# Altium PCB Overo Carrier.PcbDoc (part 1 of 2)
Units mil, origin at the board's own origin, x right, y up, seen from the top; angles counter-clockwise.
Board outline 2283.46 x 1417.32 mil, 2 copper layers (Top Layer, Bottom Layer), stack 22.091 mil thick; 56 components, 60 nets, 366 pads, 111 vias.
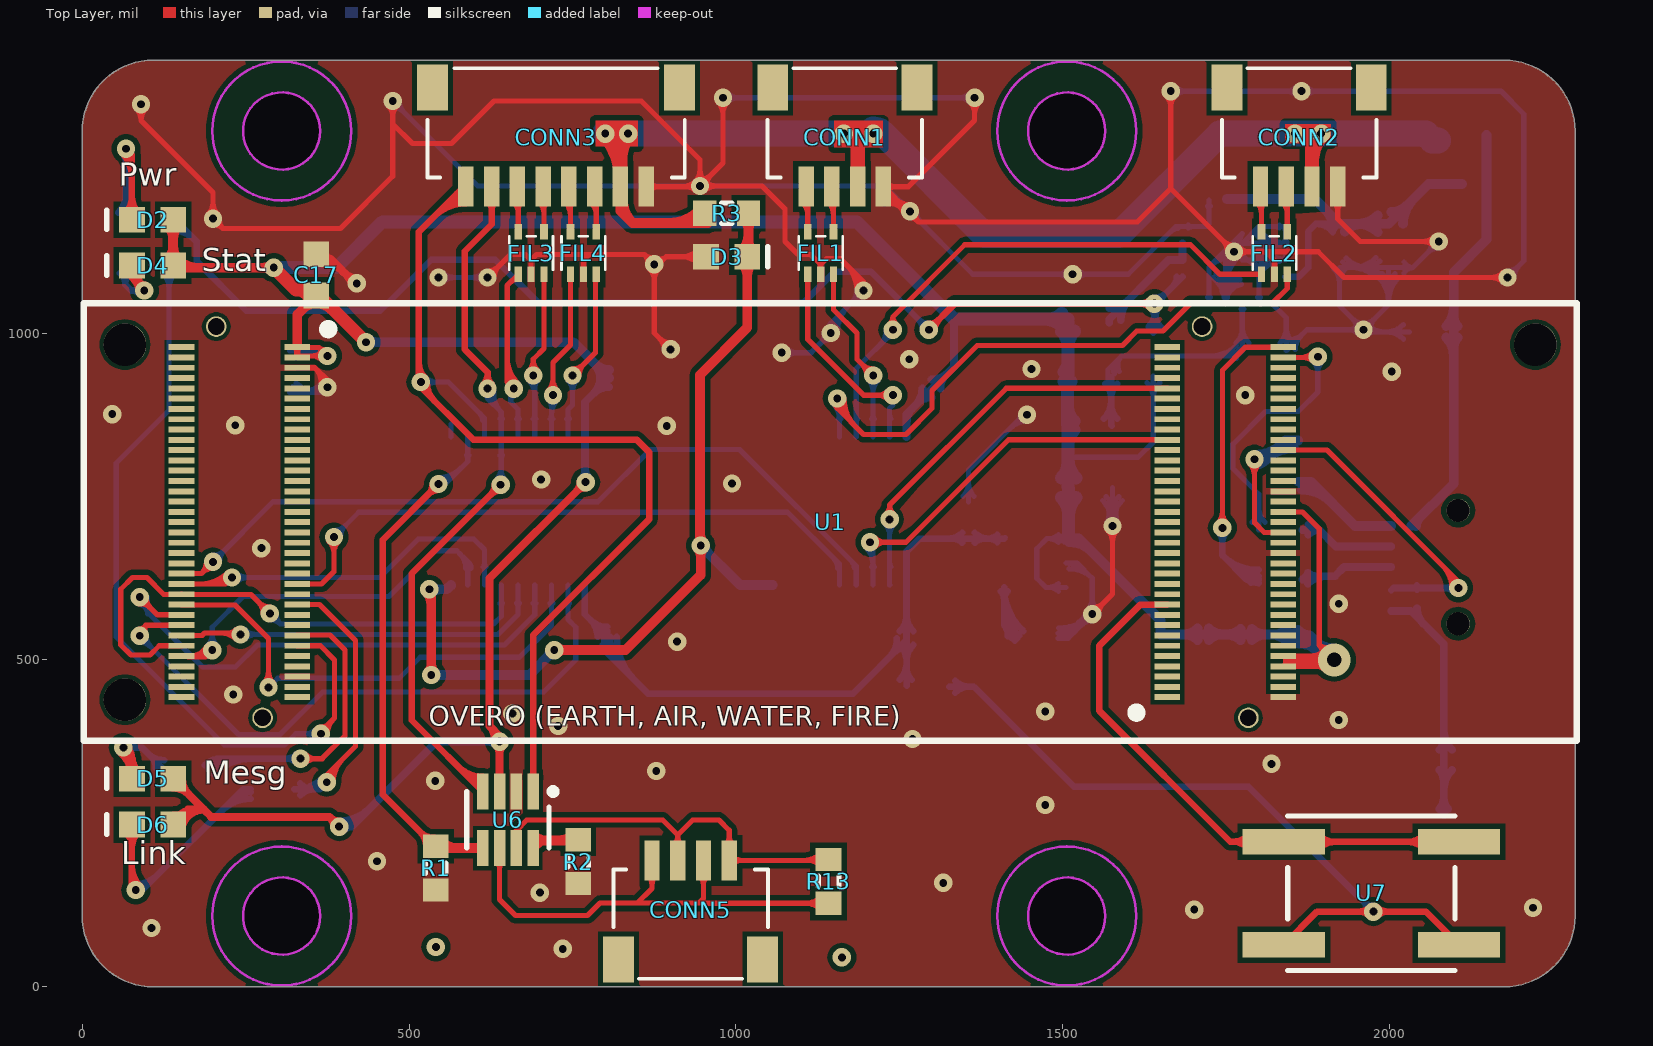
[diagram p0: Top Layer view]
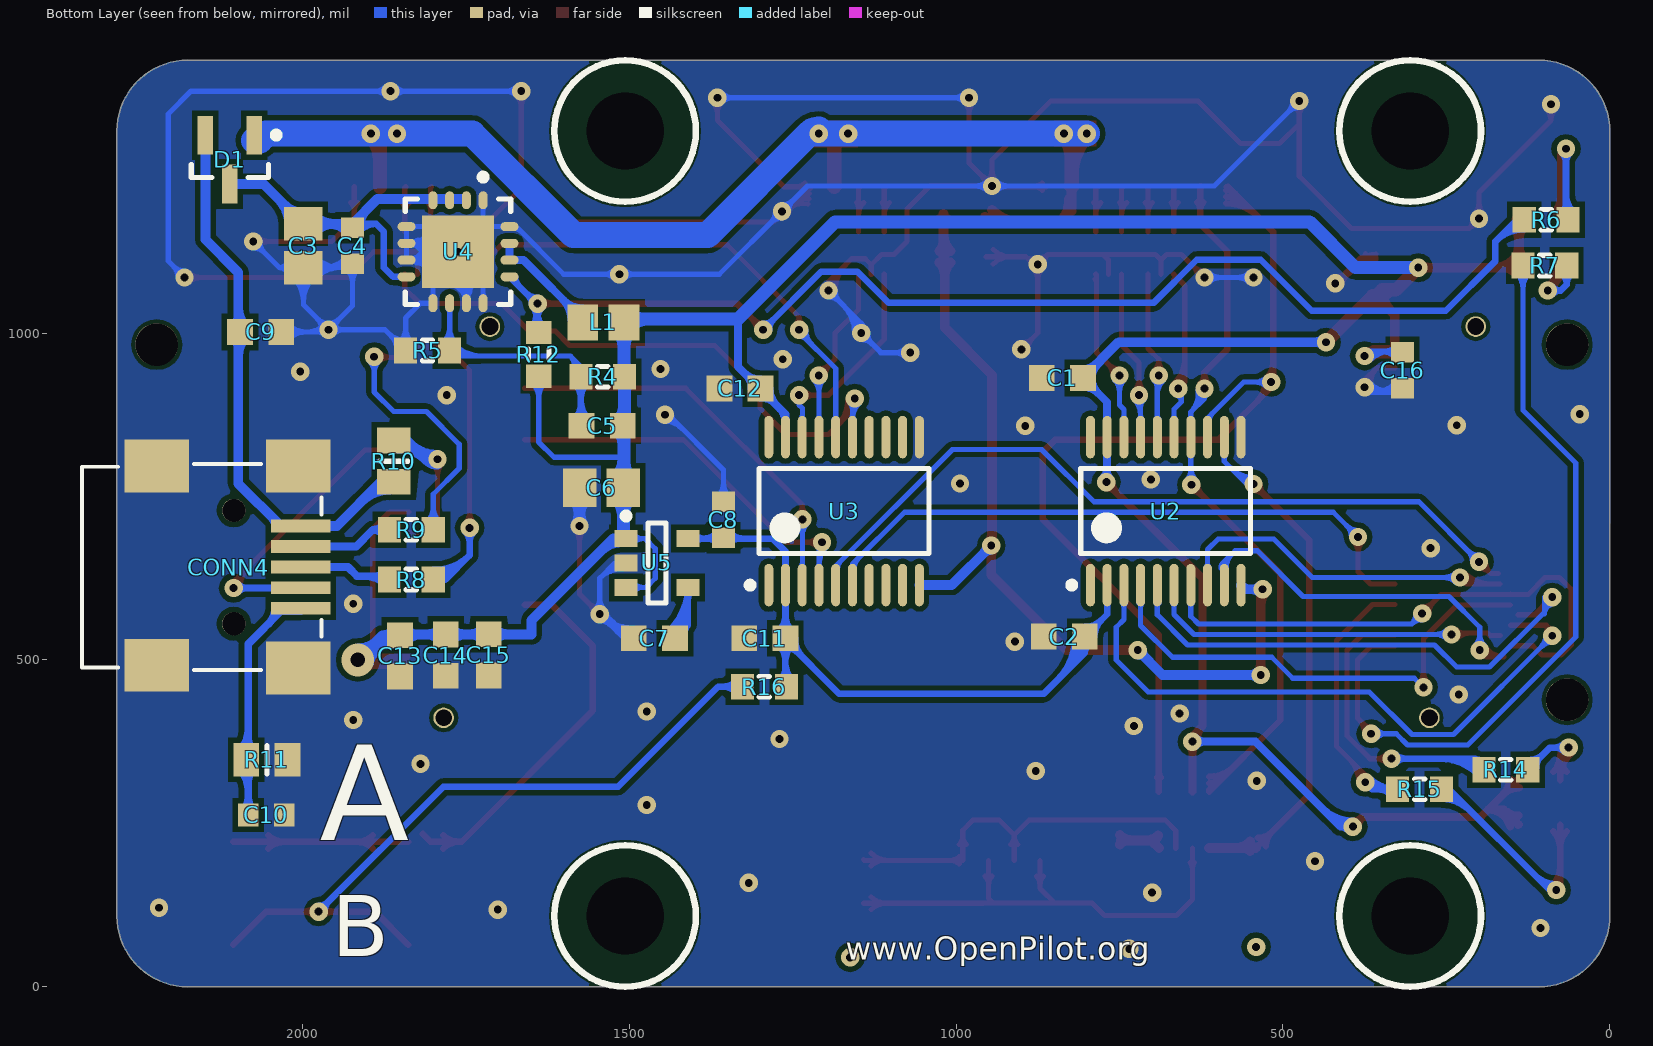
[diagram p1: Bottom Layer view, seen from below]
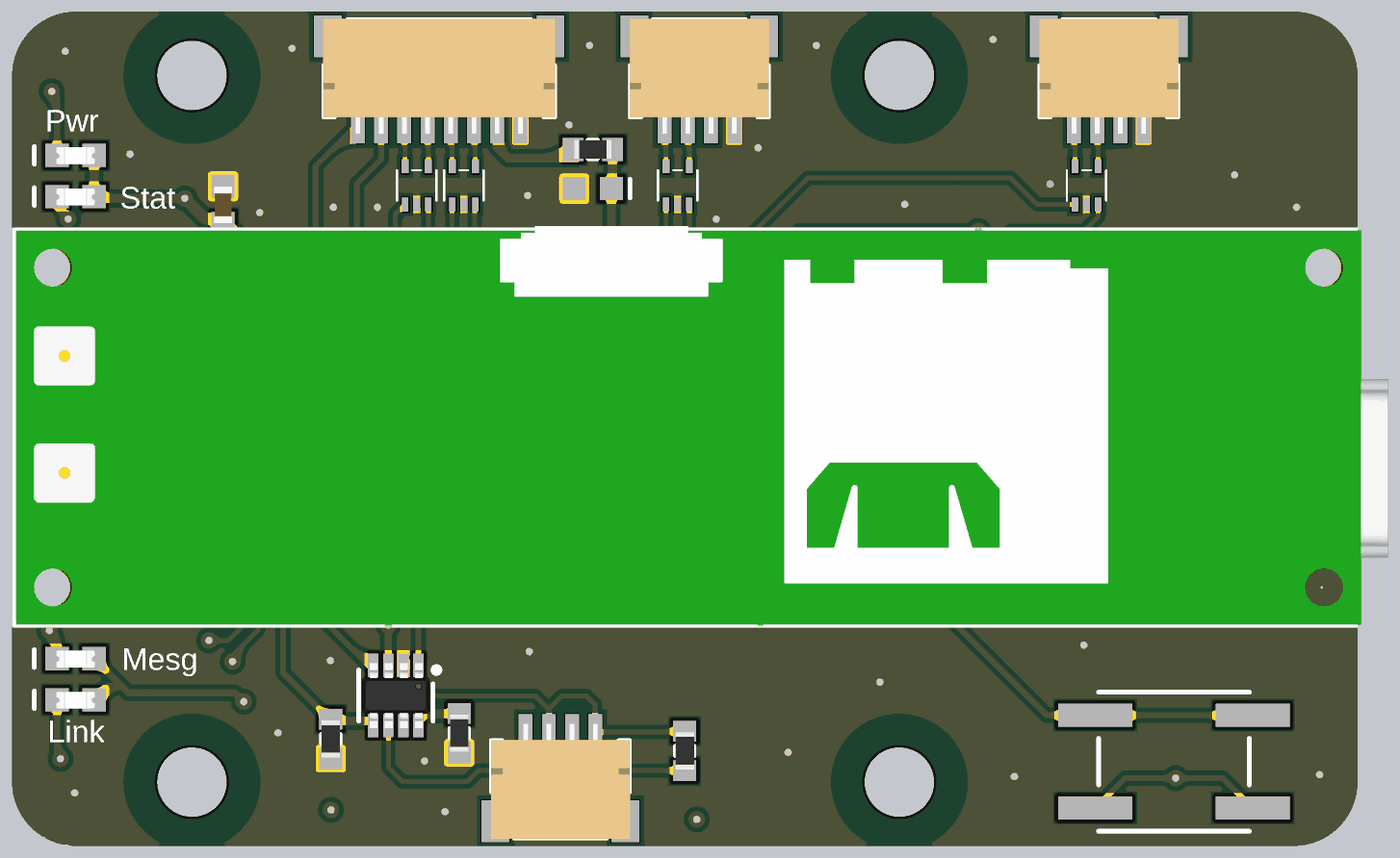
[diagram p3: 3D render of the assembled board from above, using the file's embedded part models]
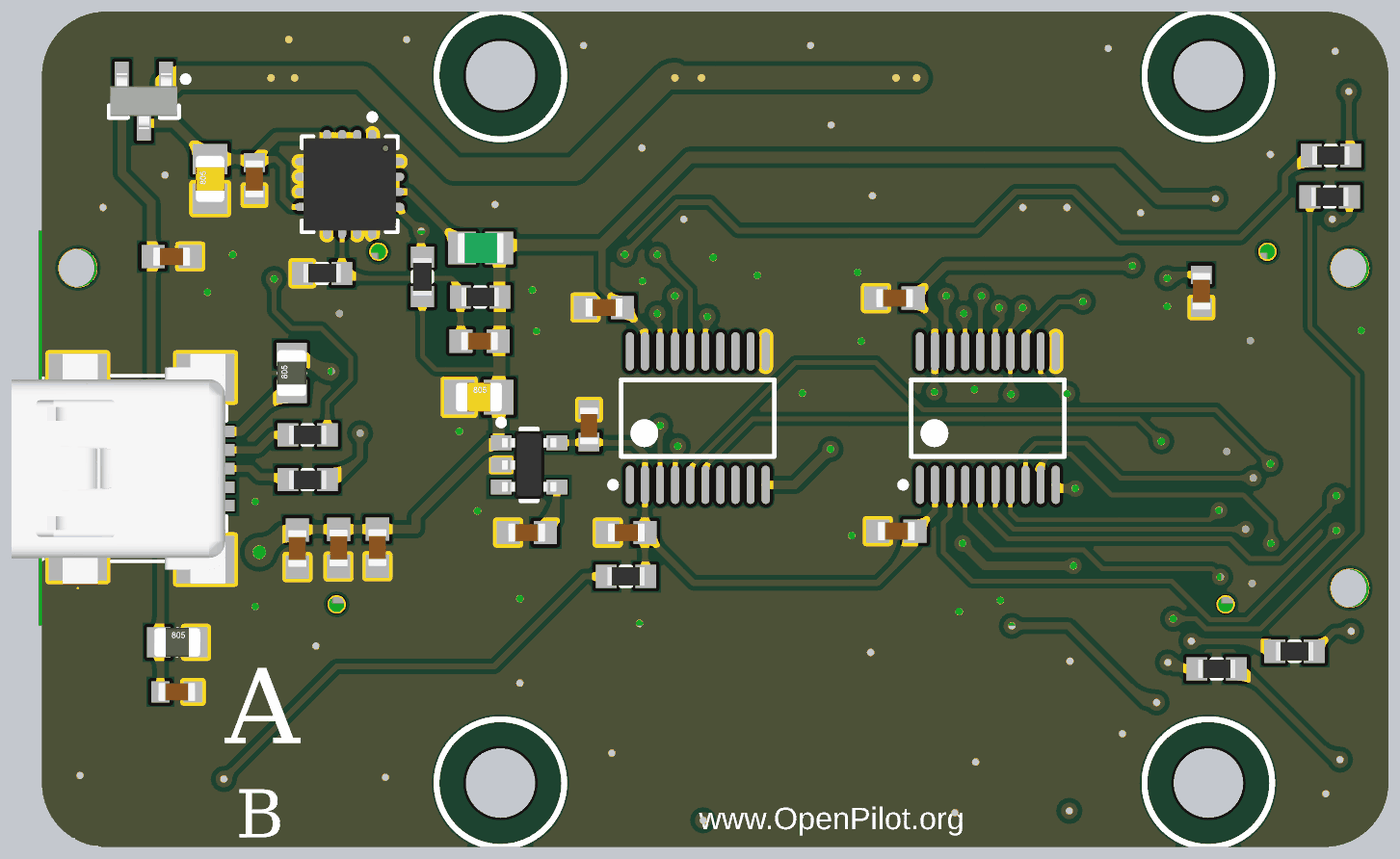
[diagram p4: 3D render of the assembled board from below, using the file's embedded part models]

## Layer stack, top to bottom
Top Layer: signal copper 1.4
Dielectric: core 19.2913, FR-4, Dk 4.8
Bottom Layer: signal copper 1.4

## Board outline
108.27,0 cw(c108.27,108.27) 0,108.27 0,1309.05 cw(c108.27,1309.05) 108.27,1417.32 2175.2,1417.32 cw(c2175.2,1309.05) 2283.46,1309.05 2283.46,108.27 cw(c2175.2,108.27) 2175.2,0

## Design rules (kind name [scope] priority, off if disabled: settings)
Clearance "Clearance Small Footprints" [HasFootprint('OVERO') OR HasFootprint('SOT23-8')] p1: gap=6
Clearance [All] p2: gap=8
ComponentClearance [NOT (HasFootprint('SIP3 - 0.1'))] p1: gap=10 collisioncheckmode=3 verticalgap=10 showdistances=FALSE
FabricationTestPointUsage TestPointUsage [All] p1: valid=0 allowmultiple=FALSE
FabricationTestpoint Testpoint [All] p1: side=3 testpointundercomponent=TRUE minsize=40 maxsize=100 preferedsize=60 minholesize=0 maxholesize=40 preferedholesize=32 testpointgrid=1 allowsidetop=TRUE allowsidebottom=TRUE usegrid=TRUE gridtolerance=0.01
HoleSize [All] p1: absolutevalues=TRUE maxlimit=157.48 minlimit=0.98 maxpercent=80.000 minpercent=20.000
MinimumAnnularRing [All] p1: minimumring=8
MinimumSolderMaskSliver [All] p1: minsoldermaskwidth=3
PlaneClearance [All] p1: clearance=9
PolygonConnect [All] p1: connectstyle=Direct reliefconductorwidth=20 reliefentries=4 polygonreliefangle="90 Angle"
RoutingVias [All] p1: holewidth=12 width=28 viastyle="Through Hole" minholewidth=12 minwidth=28 maxholewidth=22 maxwidth=50
SilkscreenOverComponentPads [All] p1: minsilkscreentomaskgap=10
SolderMaskExpansion [All] p1: expansion=6
Width [All] p1: maxlimit=80 minlimit=6 preferedwidth=8 minimp=50.000000 maximp=50.000000 favimp=50.000000
21 further rules are at their usual default settings.

## Components (designator, comment, footprint, x,y, rotation, side; value= is the part's Value field where it differs from the comment)
C1 "Cap603" CAP603N 837.4,931.27 r180 bottom
C2 "Cap603" CAP603N 834.4,535.73 r180 bottom
C3 "Cap805" CAP805N 1998.27,1133.6 r90 bottom
C4 "Cap603" CAP603L 1923.27,1133.6 r90 bottom
C5 "Cap603" CAP603N 1541.4,858.27 r180 bottom
C6 "Cap805" CAP805N 1542.4,763.27 r180 bottom
C7 "Cap603" CAP603N 1461.4,533.27 r180 bottom
C8 "Cap603" CAP603L 1355.73,714.4 r270 bottom
C9 "Cap603" CAP603N 2063.6,1001.73 r0 bottom
C10 "Cap603" CAP603L 2055,263 r0 bottom
C11 "Cap603" CAP603N 1292.4,533.27 r180 bottom
C12 "Cap603" CAP603N 1330.4,915.27 r180 bottom
C13 "Cap603" CAP603N 1850.4,506.27 r90 bottom
C14 "Cap603" CAP603N 1780.4,507.27 r90 bottom
C15 "Cap603" CAP603N 1714.6,507.73 r270 bottom
C16 "Cap603" CAP603L 317,943 r90 bottom
C17 "Cap603" CAP603N 358,1089 r270 top
CONN1 "Serial 1" "JST SH 4 Pin Side Entry" 1166.4,1405 r180 top
CONN2 "Serial 2" "JST SH 4 Pin Side Entry" 1861.4,1405 r180 top locked
CONN3 "External SPI / CAN" "JST SH 8 Pin Side Entry" 724.73,1405 r180 top
CONN4 "USB" "USB SMD" 2222.73,642 r270 bottom
CONN5 "CAN" "JST SH 4 Pin Side Entry" 930.6,12.27 r0 top
D1 "BAT54C" SOT23-3N 2110.73,1265.4 r270 bottom
D2 "PWR" LED603N 107.6,1173.27 r0 top
D3 "Diode Zen 3.3V 0603" IND603N 985.6,1116.73 r180 top
D4 "RUN" LED603N 107.6,1103.27 r0 top
D5 "Mesg" LED603N 107.6,318.12 r0 top locked
D6 "Connected" LED603N 107.6,248.12 r0 top locked
FIL1 "IP4256CZ5-W,115" SOT-665 1129.6,1122.27 r90 top
FIL2 "IP4256CZ5-W,115" SOT-665 1823.6,1122.27 r90 top
FIL3 "IP4256CZ5-W,115" SOT-665 686.6,1122.27 r90 top
FIL4 "IP4256CZ5-W,115" SOT-665 766.6,1122.27 r90 top
L1 "FB 550mA 6.8µH 0805" IND805L 1539.4,1016.27 r180 bottom
R1 "Res603" RES603N 540.73,181.6 r90 top
R2 "Res603" RES603N 758.73,191.6 r90 top
R3 "Res603" RES603N 985.6,1183.27 r0 top
R4 "Res603" RES603N 1540.4,933.27 r180 bottom
R5 "Res603" RES603N 1808.4,973.27 r180 bottom
R6 "Res603" RES603N 97.4,1173.27 r180 bottom
R7 "Res603" RES603N 99.4,1103.27 r180 bottom
R8 "Res603" RES603N 1833,623 r180 bottom
R9 "Res603" RES603N 1833,699 r180 bottom
R10 "Res805" RES805L 1860,804 r90 bottom
R11 "Res805" RES805L 2054,347 r180 bottom
R12 "Res603" RES603N 1638.4,967.27 r90 bottom
R13 "Res603" RES603N 1141.6,161.27 r90 top
R14 "Res603" RES603N 159,332 r0 bottom
R15 "Res603" RES603N 291,302 r0 bottom
R16 "Res603" RES603N 1293,459 r0 bottom
U1 "Overo" OVERO 65.27,439.04 r0 top locked
U2 "TXB0108" SOP65P640X162-20N 679.27,727.6 r90 bottom
U3 "TXB0108" SOP65P640X162-20N 1171.27,727.6 r90 bottom
U4 "TPS62111" QFN65P400X400X100-16N 1761.73,1124.4 r270 bottom
U5 "MIC5247-1.8" SOT23-5L 1457.4,648.27 r180 bottom
U6 "CAN Transceiver" SOT23-8 651.27,255.4 r270 top
U7 "Switch push Button" EVQ-Q2K03W 1972,143 r180 top

## Footprints (in the part's own frame and the unit in brackets; to place one, negate y for a bottom-side part, rotate by r counter-clockwise, add the part's x,y. Pads: shape width x height; smd on the part's side, far side on the other; paste and mask are expansions set on the pad)
CAP603L [mm] "Chip Capacitor, Body 1.6x0.8mm, IPC High Density"
  rect 0.8x0.9 smd: 1(-0.7,0) 2(0.7,0)
  body extent -0.8,-0.4 0.8,0.4, height 0.77
CAP603N [mm] "Chip Capacitor, Body 1.6x0.8mm, IPC Medium Density"
  rect 1x1 smd: 1(-0.8,0) 2(0.8,0)
  body extent -0.8,-0.4 0.8,0.4, height 0.77
CAP805N [mm] "Chip Capacitor, Body 2.0x1.3mm, IPC Medium Density"
  rect 1.3x1.5 smd: 1(-0.85,0) 2(0.85,0)
  body extent -1,-0.62 1,0.63, height 0.78
EVQ-Q2K03W [mm] "SWITCH TACTILE SPST-NO 0.02A 15V - P12943SCT-ND"
  rect 3.2x1 smd: A(-3.4,2) A(3.4,2) B(-3.4,-2) B(3.4,-2)
  silkscreen extent -3.25,-3 3.25,3, body extent -3.25,-3 3.25,3, height 3.41
IND603N [mm] "Chip Inductor, Body 1.6x0.8mm, IPC Medium Density"
  rect 1x1 smd: 1(-0.8,0) 2(0.8,0)
  silkscreen extent -1.6,-0.4 -1.6,0.4, body extent -0.87,-0.48 0.87,0.48, height 0.71
IND805L [mm] "Chip Inductor, Body 2.0x1.2mm, IPC High Density"
  rect 1.2x1.4 smd: 1(-0.8,0) 2(0.8,0)
  body extent -1,-0.65 1,0.65, height 0.6
"JST SH 4 Pin Side Entry" [mm] "SM04B-SRSS-TB"
  rect 1.2x1.8 smd paste+0 mask+0.051: 0(-2.8,0.75) 0(2.8,0.75)
  rect 0.6x1.55 smd paste+0 mask+0.051: 1(-1.5,4.6) 2(-0.5,4.6) 3(0.5,4.6) 4(1.5,4.6)
  silkscreen extent -3,0 3,4.25, body extent -3,0 3,4.95, height 2.92
"JST SH 8 Pin Side Entry" [mm] "SM08B-SRSS-TB"
  rect 1.2x1.8 smd paste+0 mask+0.051: 0(-4.8,0.75) 0(4.8,0.75)
  rect 0.6x1.55 smd paste+0 mask+0.051: 1(-3.5,4.6) 2(-2.5,4.6) 3(-1.5,4.6) 4(-0.5,4.6) 5(0.5,4.6) 6(1.5,4.6) 7(2.5,4.6) 8(3.5,4.6)
  silkscreen extent -5,0 5,4.25, body extent -5,0 5,4.95, height 2.92
LED603N [mm] "Chip LED, Body 1.6x0.8mm, IPC Medium Density"
  rect 1x1 smd: 1(-0.8,0) 2(0.8,0)
  silkscreen extent -1.78,-0.38 -1.78,0.38, body extent -0.82,-0.38 0.82,0.34, height 0.68
OVERO [mm] "Gumstix Overo Outline"
  round 1.65 hole 1.65 mask+0.05: 0(0,0) 0(0,13.8) 0(54.8,13.8)
  round 0.8 hole 0.65 mask+0.05: 0(3.55,14.5) 0(5.35,-0.7) 0(41.85,14.5) 0(43.65,-0.7)
  round 0 all layers, no hole mask+0.05: 0(54.8,0)
  rect 1x0.23 smd mask+0.05: J1-1(40.5,0.1) J1-2(40.5,0.5) J1-3(40.5,0.9) J1-4(40.5,1.3) J1-5(40.5,1.7) J1-6(40.5,2.1) J1-7(40.5,2.5) J1-8(40.5,2.9) J1-9(40.5,3.3) J1-10(40.5,3.7) J1-11(40.5,4.1) J1-12(40.5,4.5) J1-13(40.5,4.9) J1-14(40.5,5.3) J1-15(40.5,5.7) J1-16(40.5,6.1) J1-17(40.5,6.5) J1-18(40.5,6.9) J1-19(40.5,7.3) J1-20(40.5,7.7) J1-21(40.5,8.1) J1-22(40.5,8.5) J1-23(40.5,8.9) J1-24(40.5,9.3) J1-25(40.5,9.7) J1-26(40.5,10.1) J1-27(40.5,10.5) J1-28(40.5,10.9) J1-29(40.5,11.3) J1-30(40.5,11.7) J1-31(40.5,12.1) J1-32(40.5,12.5) J1-33(40.5,12.9) J1-34(40.5,13.3) J1-35(40.5,13.7) J1-36(45,13.7) J1-37(45,13.3) J1-38(45,12.9) J1-39(45,12.5) J1-40(45,12.1) J1-41(45,11.7) J1-42(45,11.3) J1-43(45,10.9) J1-44(45,10.5) J1-45(45,10.1) J1-46(45,9.7) J1-47(45,9.3) J1-48(45,8.9) J1-49(45,8.5) J1-50(45,8.1) J1-51(45,7.7) J1-52(45,7.3) J1-53(45,6.9) J1-54(45,6.5) J1-55(45,6.1) J1-56(45,5.7) J1-57(45,5.3) J1-58(45,4.9) J1-59(45,4.5) J1-60(45,4.1) J1-61(45,3.7) J1-62(45,3.3) J1-63(45,2.9) J1-64(45,2.5) J1-65(45,2.1) J1-66(45,1.7) J1-67(45,1.3) J1-68(45,0.9) J1-69(45,0.5) J1-70(45,0.1) J4-1(6.7,13.7) J4-2(6.7,13.3) J4-3(6.7,12.9) J4-4(6.7,12.5) J4-5(6.7,12.1) J4-6(6.7,11.7) J4-7(6.7,11.3) J4-8(6.7,10.9) J4-9(6.7,10.5) J4-10(6.7,10.1) J4-11(6.7,9.7) J4-12(6.7,9.3) J4-13(6.7,8.9) J4-14(6.7,8.5) J4-15(6.7,8.1) J4-16(6.7,7.7) J4-17(6.7,7.3) J4-18(6.7,6.9) J4-19(6.7,6.5) J4-20(6.7,6.1) J4-21(6.7,5.7) J4-22(6.7,5.3) J4-23(6.7,4.9) J4-24(6.7,4.5) J4-25(6.7,4.1) J4-26(6.7,3.7) J4-27(6.7,3.3) J4-28(6.7,2.9) J4-29(6.7,2.5) J4-30(6.7,2.1) J4-31(6.7,1.7) J4-32(6.7,1.3) J4-33(6.7,0.9) J4-34(6.7,0.5) J4-35(6.7,0.1) J4-36(2.2,0.1) J4-37(2.2,0.5) J4-38(2.2,0.9) J4-39(2.2,1.3) J4-40(2.2,1.7) J4-41(2.2,2.1) J4-42(2.2,2.5) J4-43(2.2,2.9) J4-44(2.2,3.3) J4-45(2.2,3.7) J4-46(2.2,4.1) J4-47(2.2,4.5) J4-48(2.2,4.9) J4-49(2.2,5.3) J4-50(2.2,5.7) J4-51(2.2,6.1) J4-52(2.2,6.5) J4-53(2.2,6.9) J4-54(2.2,7.3) J4-55(2.2,7.7) J4-56(2.2,8.1) J4-57(2.2,8.5) J4-58(2.2,8.9) J4-59(2.2,9.3) J4-60(2.2,9.7) J4-61(2.2,10.1) J4-62(2.2,10.5) J4-63(2.2,10.9) J4-64(2.2,11.3) J4-65(2.2,11.7) J4-66(2.2,12.1) J4-67(2.2,12.5) J4-68(2.2,12.9) J4-69(2.2,13.3) J4-70(2.2,13.7)
  silkscreen extent -1.6,-1.6 56.4,15.4, body extent -1.5,-1.6 56.5,15.6, height 3.78
QFN65P400X400X100-16N [mm] "QFN, 16-Leads, Body 4.1x4.1mm (max), Pitch 0.65mm, IPC Medium Density"
  rect 2.8x2.8 smd: 0(0,0)
  oval 0.7x0.35 smd: 1(-2,0.975) 2(-2,0.325) 3(-2,-0.325) 4(-2,-0.975) 9(2,-0.975) 10(2,-0.325) 11(2,0.325) 12(2,0.975)
  oval 0.35x0.7 smd: 5(-0.975,-2) 6(-0.325,-2) 7(0.325,-2) 8(0.975,-2) 13(0.975,2) 14(0.325,2) 15(-0.325,2) 16(-0.975,2)
  silkscreen extent -3.02,-2.05 2.05,2.05, body extent -2,-2 2,2, height 0.92
RES603N [mm] "Chip Resistor, Body 1.6x0.8mm, IPC Medium Density"
  rect 0.9x1 smd: 1(-0.85,0) 2(0.85,0)
  silkscreen extent -0.2,-0.4 0.2,0.4, body extent -0.8,-0.4 0.8,0.4, height 0.44
RES805L [mm] "Chip Resistor, Body 2.0x1.3mm, IPC High Density"
  rect 1x1.3 smd: 1(-0.8,0) 2(0.8,0)
  silkscreen extent 0,-0.55 0,0.55, body extent -1,-0.62 1,0.63, height 0.78
SOP65P640X162-20N [mm] "SOP, 20-Leads, Body 6.6x4.5mm (max), Pitch 0.65mm, IPC Medium Density"
  oval 1.65x0.35 smd: 1(-2.875,2.925) 2(-2.875,2.275) 3(-2.875,1.625) 4(-2.875,0.975) 5(-2.875,0.325) 6(-2.875,-0.325) 7(-2.875,-0.975) 8(-2.875,-1.625) 9(-2.875,-2.275) 10(-2.875,-2.925) 11(2.875,-2.925) 12(2.875,-2.275) 13(2.875,-1.625) 14(2.875,-0.975) 15(2.875,-0.325) 16(2.875,0.325) 17(2.875,0.975) 18(2.875,1.625) 19(2.875,2.275) 20(2.875,2.925)
  silkscreen extent -3,-3.3 1.65,3.78, body extent -2.25,-3.3 2.25,3.3, height 1.62
SOT23-3N [mm] "SOT23, 3-Leads, Body 2.9x1.3mm, Pitch 0.95mm, Lead Span 2.5mm, IPC Medium Density"
  rect 1.5x0.6 smd: 1(-0.95,0.95) 2(-0.95,-0.95) 3(0.95,0)
  silkscreen extent -1.07,-1.5 0.7,1.92, body extent -1.21,-1.45 1.21,1.45, height 0.99
SOT23-5L [mm] "SOT23, 5-Leads, Body 2.9x1.6mm, Pitch 0.95mm, Lead Span 2.8mm, IPC High Density"
  rect 0.9x0.65 smd mask+0.076: 1(-1.2,0.95) 2(-1.2,0) 3(-1.2,-0.95) 4(1.2,-0.95) 5(1.2,0.95)
  silkscreen extent -1.33,-1.55 0.35,1.95, body extent -1.17,-1.46 1.17,1.46, height 0.97
SOT23-8 [mm] "SSOP; 8 Leads; Body Width 1.6 mm; Pitch 0.65 mm"
  rect 1.4x0.45 smd: 1(-1.1,0.975) 2(-1.1,0.325) 3(-1.1,-0.325) 4(-1.1,-0.975) 5(1.1,-0.975) 6(1.1,-0.325) 7(1.1,0.325) 8(1.1,0.975)
  silkscreen extent -1.22,-1.6 1.1,1.88, body extent -1.4,-1.47 1.4,1.47, height 1.2
SOT-665 [mm] "NXP SOT665"
  rect 0.6x0.28 smd mask+0.076: 1(-0.825,0.5) 2(-0.825,0) 3(-0.825,-0.5)
  rect 0.6x0.3 smd mask+0.076: 4(0.825,-0.5) 5(0.825,0.5)
  silkscreen extent -0.65,-0.85 0.65,0.85, body extent -0.65,-0.85 0.65,0.85, height 0.6
"USB SMD" [mm] "DX2R005HN2E700"
  rect 2.05x2.5 smd: 0(-3.925,0) 0(-3.925,5.5) 0(3.81,0) 0(3.925,5.5)
  rect 0.5x2.3 smd mask+0.085: 1(-1.6,5.6) 2(-0.8,5.6) 3(0,5.6) 4(0.8,5.6) 5(1.6,5.6)
  round 0.9 hole 0.9 unplated: 6(-2.2,3) 6(2.2,3)
  silkscreen extent -4,-2.9 4,6.4, body extent -4.95,-2.85 4.95,6.35, height 4.17

## Part data
C1 C2 C3 C4 C5 C6 C7 C8 C9 C10 C11 C12 C13 C14 C15 C16 C17: "Capacitor SMD"
CONN1 CONN2 CONN5: library part "JST-SH 4-pin Side Entry Socket", "JST-SH 4-pin Side Entry Socket"
CONN3: library part "JST-SH 8-pin Side Entry Socket", "JST-SH 8-pin Side Entry Socket"
CONN4: library part USB_SMT_B, "USB Type-B SMT Socket"
D1: "Dual Diode Command Cathode"
D2: library part "LED 603 Gr", "Green 603 LED"
D3: library part "Diode Zener 3.3V 150MW 0603", "Diode Zener 3.3V 150MW 0603"
D4: library part "LED 603 Bl", "Blue 603 LED"
D5: library part "LED 603 Or", "Orange 603 LED"
D6: library part "LED 603 Yellow", "Yellow 603 LED"
FIL1 FIL2 FIL3 FIL4: library part "RF Filter 100R 30pF", "IP4256CZ5-W,115 2 channel, 100R, 30pF, RF ESD Filter"
L1: library part "Ferrite Bead 550mA 6.8µH 0805", "Ferrite Bead 550mA 6.8µH"
R1 R2 R3 R4 R5 R6 R7 R8 R9 R10 R11 R12 R13 R14 R15 R16: "Resistor SMD"
U1: "Gumstix Overo COM"
U2 U3: library part TXB0108PW, "Bidirection level shifter"
U5: "1.8V 150mA LDO Regulator A Grade"
U6: library part "CAN MAX3051", "CAN Transceiver MAX3051"
U7: library part "Push Switch"

## Free pads (board coordinates)
  round 114.17 hole 118.11 unplated: 0(305.12,108.27) 0(305.12,1309.05) 0(1505.91,108.27) 0(1505.91,1309.05)

## Via types
v1: diameter 28, hole 12, Top Layer to Bottom Layer, tented both sides, 109 vias
v2: diameter 28, hole 12, Top Layer to Bottom Layer, tented top, 1 vias
v3: diameter 50, hole 22, Top Layer to Bottom Layer, tented both sides, 1 vias

## Nets (pads, with @x,y where several pads share a name; then routed paths per layer and width w, separated by ;. In a path a pad name is that pad's centre, name@x,y a point inside that pad or via, vN(x,y) a via of type N, cw(c..) or ccw(c..) an arc to the next point about the centre after c; other vN are vias at no path point)
"CAN RX": CONN3.7 U2.14 U6.4 | length 1370.2
  Top Layer w10: 574.37,337.22 ccw(c612.88,375.73) U6.4@612.88,321.27 ; 591.44,320.15 ccw(c612.88,341.59) U6.4@612.88,311.27 ; U6.4@608.51,303.08 ccw(c612.88,307.45) U6.4@612.88,301.27 ; U6.4@612.88,298.71 504,407.59 504,632 v1(640,768) ; v1@613.64,921.36 ccw(c598.27,936.73) 620,936.73 ccw(c641.73,936.73) v1@626.36,921.36 ; v1(620,915) 620,940 585,975 585,1125 626.31,1166.31 CONN3.7@626.31,1223.9 ; CONN3.7@621.49,1200.38 cw(c609.86,1188.75) 626.31,1188.75 cw(c642.75,1188.75) CONN3.7@631.12,1200.38 ; v1@631,768 cw(c609.27,768) 624.64,752.64 cw(c640,737.27) v1@640,759
  Bottom Layer w8: v1@616.15,905.77 cw(c613.75,900) 620,900 ; v1(620,915) 620,900 ; v1@621.97,914.67 ccw(c649.81,910.09) 629.86,890.14 ; v1@623.85,905.77 ccw(c626.25,900) 620,900 ; v1@629.87,913.37 ccw(c668.73,906.97) 640.88,879.12 ; v1@632.93,775.07 ccw(c613.73,794.27) 640.88,794.27 ; U2.14@638.84,813.16 cw(c633.91,808.22) 640.88,808.22 cw(c647.86,808.22) U2.14@642.92,813.16 ; U2.14@638.84,868.42 ccw(c633.91,873.36) 640.88,873.36 ccw(c647.86,873.36) U2.14@642.92,868.42 ; v1@640.88,768.88 U2.14@640.88,840.79 640.88,879.12 ; 640.88,790.01 ccw(c662.01,790.01) v1@647.07,775.07 ; 620,900 640.88,879.12
"CAN TX": CONN3.8 U2.13 U6.1 | length 1704.2
  Top Layer w8: CONN3.8@583.9,1223.9 CONN3.8@586.94,1223.9
  Top Layer w10: v1@511.64,931.36 ccw(c503.51,939.49) 515,939.49 ; v1@514,921 598,837 848,837 867,818 867,715 689.65,537.65 U6.1@689.65,298.71 ; v1@515,925 515,1155 CONN3.8@583.9,1223.9 ; 515,953.97 ccw(c546.97,953.97) v1@524.36,931.36 ; v1@527,925 ccw(c568.04,925) 539.02,895.98 ; 538.2,1178.2 cw(c586.94,1129.46) CONN3.8@586.94,1198.39 ; 555.27,1195.27 cw(c586.94,1163.6) CONN3.8@586.94,1208.39 ; 572.34,1212.34 cw(c586.94,1197.74) CONN3.8@586.94,1218.39 ; U6.1@686.93,320.14 ccw(c680.34,326.72) 689.65,326.72 ccw(c698.97,326.72) U6.1@692.38,320.14
  Bottom Layer w8: v1(518,925) 560,925 615.29,869.71 U2.13@615.29,840.79 ; v1@525.07,917.93 cw(c542.14,900.86) 542.14,925 cw(c542.14,949.14) v1@525.07,932.07 ; 608,877 cw(c597.39,866.38) U2.13@612.4,866.38
CLK: FIL4.3 U2.18 | length 359.9
  Top Layer w8: v1(750,935) 785,970 785,1088.5 FIL4.3@786.28,1089.79 ; v1@750,945 ccw(c750,969.14) 767.07,952.07 ccw(c784.14,935) v1@760,935 ; 785,1076.74 cw(c793.03,1076.74) FIL4.3@787.35,1082.42
  Bottom Layer w8: U2.18@741.2,868.42 ccw(c736.27,873.36) 743.24,873.36 ccw(c750.22,873.36) U2.18@745.29,868.42 ; v1@742.93,927.93 cw(c725.86,910.86) 750,910.86 cw(c774.14,910.86) v1@757.07,927.93 ; U2.18@743.24,840.79 743.24,883.24 750,890 v1(750,935)
GND: C1.1 C2.1 C3.1 C4.1 C6.1 C7.1 C8.1 C9.1 C10.1 C11.1 C12.1 C13.1 C14.1 C15.2 C16.1 C17.1 CONN1.1 CONN2.1 CONN3.1 CONN4.0 D3.2 FIL1.2 FIL2.2 FIL3.2 FIL4.2 R1.1 R2.1 R5.1 R11.2 U1.J1-50 U1.J1-56 U1.J1-70 U1.J4-3 U1.J4-33 U2.11 U3.11 U4.0 U4.1 U4.5 U4.6 U4.7 U4.9 U4.11 U4.12 U4.16 U5.2 U6.2 | length 14104.5
  Top Layer w8: v1@82.93,1342.93 cw(c65.86,1325.86) 90,1325.86 cw(c114.14,1325.86) v1@97.07,1342.93 ; v1(90,1350) 90,1325 200,1215 v1(200,1175) 215,1160 ; v1@192.93,1182.07 ccw(c175.86,1199.14) 200,1199.14 ccw(c224.14,1199.14) v1@207.07,1182.07 ; v1@200.96,1165.05 cw(c202.63,1147.63) 215,1160 ; v1@209.95,1174.04 ccw(c227.37,1172.37) 215,1160 ; U1.J4-3@329.05,946.91 356.09,946.91 ; C17.1@358,1104.81 cw(c358,1024.69) v1@414.66,1081.34 ; C17.1@358,1112.81 cw(c358,1052) 401,1095 ; C17.1@358,1115.5 380.5,1115.5 ; C17.1@358,1120.81 cw(c358,1079.31) 387.34,1108.66 ; v1@365.14,918.65 ccw(c333.17,923.99) 356.09,946.91 ; 367.07,935.93 cw(c351.99,920.85) v1@373.03,917.33 ; C17.1@370.15,1110.58 cw(c380.5,1102.14) 380.5,1115.5 ; C17.1@373.63,1121.81 ccw(c380.5,1122.39) 380.5,1115.5 ; v1(375,917) 375,928 356.09,946.91 ; 397.05,1092.44 cw(c381.14,1067.18) v1@410.25,1073.79 ; 403.88,1088.13 ccw(c413.71,1103.73) v1@417.79,1085.75 ; v1@410,1076 ccw(c385.86,1076) 402.93,1093.07 ccw(c420,1110.14) v1@420,1086 ; v1(420,1076) 380.5,1115.5 ; v1@467.93,1347.93 cw(c450.86,1330.86) 475,1330.86 cw(c499.14,1330.86) v1@482.07,1347.93 ; v1(475,1355) 475,1320 ; v1(620,1085) 655,1120 678.2,1120 686.6,1111.6 ; v1@620,1095 ccw(c620,1119.14) 637.07,1102.07 ccw(c654.14,1085) v1@630,1085 ; FIL3.2@686.6,1089.79 686.6,1111.6 ; FIL4.2@766.6,1089.79 766.6,1111.6 775,1120 ; CONN3.1@862.53,1223.9 943.9,1223.9 v1(945,1225) ; v1@865.05,1105.96 ccw(c847.63,1107.63) 860,1120 ; v1@867.93,1097.93 cw(c850.86,1080.86) 875,1080.86 cw(c899.14,1080.86) v1@882.07,1097.93 ; CONN3.1@868.05,1218.37 cw(c881.39,1205.04) 881.39,1223.9 cw(c881.39,1242.76) CONN3.1@868.05,1229.42 ; v1@874.04,1114.95 cw(c872.37,1132.37) 860,1120 ; v1@879.09,1114.12 ccw(c884.29,1125.71) 893.27,1116.73 ; v1@890,975 ccw(c865.86,975) 882.93,992.07 ccw(c900,1009.14) v1@900,985 ; v1(900,975) 875,1000 v1(875,1105) ; 918.2,1223.9 ccw(c918.2,1251.8) 937.93,1232.07 ccw(c920.86,1249.14) 945,1249.14 ccw(c969.14,1249.14) 952.07,1232.07 ccw(c969.14,1249.14) 969.14,1225 ccw(c969.14,1200.86) v1@952.07,1217.93 ; 923.52,1223.9 cw(c923.52,1203.52) v1@937.93,1217.93 ; D3.2@943.01,1105.64 ccw(c916.24,1078.87) 916.24,1116.73 ccw(c916.24,1154.6) D3.2@943.01,1127.82 ; v1@945,1235 ccw(c945,1259.14) 962.07,1242.07 ccw(c979.14,1225) v1@955,1225 ; D3.2@954.1,1116.73 893.27,1116.73 ; v1@972.93,1352.93 cw(c955.86,1335.86) 980,1335.86 cw(c1004.14,1335.86) v1@987.07,1352.93 ; v1(980,1360) 980,1260 v1(945,1225) ; FIL1.2@1129.6,1089.79 1129.6,1104.4 ; 1168.48,1104.88 cw(c1128.6,1065) v1@1185,1065 ; 1182.14,1091.23 cw(c1155.91,1065) v1@1193,1065 ; v1(1195,1065) 1195,1078.36 1159.77,1113.6 1138.8,1113.6 1129.6,1104.4 ; CONN1.1@1222.59,1221.13 cw(c1224.23,1211.99) CONN1.1@1230.8,1218.56 ; CONN1.1@1224,1213.26 cw(c1227.54,1193.66) 1241.61,1207.74 ; CONN1.1@1225.42,1205.38 cw(c1230.84,1175.33) 1252.43,1196.92 ; CONN1.1@1226.84,1197.51 cw(c1234.14,1156.99) v1@1263.25,1186.1 ; CONN1.1@1230.98,1218.37 cw(c1244.31,1205.04) 1244.31,1223.9 cw(c1244.31,1242.76) CONN1.1@1230.98,1229.42 ; 1241.16,1203.43 cw(c1224.76,1175.03) 1256.44,1183.51 ccw(c1237.82,1178.52) 1247.46,1195.22 ; 1244.17,1205.19 ccw(c1266.1,1227.13) v1@1266.1,1196.1 ; 1245.51,1196.35 ccw(c1254.9,1212.61) v1@1262.21,1195.31 ; 1251.05,1198.31 cw(c1238.84,1186.1) v1@1256.1,1186.1 ; 1251.17,1197.65 cw(c1246.05,1188.79) v1@1256.19,1187.43 ; v1@1266.1,1176.1 cw(c1266.1,1158.84) 1278.31,1171.05 ; v1(1266.1,1186.1) v1@1263.25,1186.1 ; v1@1275.76,1183.49 ccw(c1289.21,1179.85) 1279.35,1170 ; v1@1357.93,1352.93 cw(c1340.86,1335.86) 1365,1335.86 cw(c1389.14,1335.86) v1@1372.07,1352.93 ; v1(1365,1360) 1365,1325 1263.9,1223.9 CONN1.1@1225.46,1223.9 v1@1263.25,1186.1 ; v1(1545,570) 1575.87,600.87 v1(1575.87,705) ; v1@1545,580 ccw(c1545,604.14) 1562.07,587.07 ccw(c1579.14,570) v1@1555,570 ; v1@1568.8,697.93 cw(c1551.72,680.86) 1575.87,680.86 cw(c1600.01,680.86) v1@1582.94,697.93 ; v1@1657.93,1362.93 cw(c1640.86,1345.86) 1665,1345.86 cw(c1689.14,1345.86) v1@1672.07,1362.93 ; v1(1665,1370) 1665,1221.13 ; v2@1751.73,1124.4 ccw(c1727.59,1124.4) 1744.66,1141.47 ccw(c1761.73,1158.54) v2@1761.73,1134.4 ; v2@1768.8,1117.33 cw(c1785.87,1100.26) 1785.87,1124.4 cw(c1785.87,1148.54) v2@1768.8,1131.47 ; FIL2.2@1823.6,1089.79 1823.6,1111.4 1810.6,1124.4 ; CONN2.1@1914.93,1199.67 cw(c1901.6,1186.34) 1920.46,1186.34 cw(c1939.31,1186.34) CONN2.1@1925.98,1199.67 ; CONN2.1@1920.46,1223.9 1920.46,1174.54 1955,1140 v1(2075,1140) ; v1@2067.93,1132.93 ccw(c2050.86,1115.86) 2050.86,1140 ccw(c2050.86,1164.14) v1@2067.93,1147.07 ; v1@2172.93,1077.93 ccw(c2155.86,1060.86) 2155.86,1085 ccw(c2155.86,1109.14) v1@2172.93,1092.07 ; v1(2180,1085) 1930,1085 1890.6,1124.4 1810.6,1124.4 ; 215,1160 395,1160 475,1240 475,1320 ; 475,1320 505,1290 565,1290 630,1355 855,1355 945,1265 v1(945,1225) ; 686.6,1111.6 695,1120 775,1120 ; 775,1120 860,1120 ; 860,1120 v1(875,1105) ; v1(875,1105) 878.27,1101.73 893.27,1116.73 ; v1(945,1225) 1040,1225 1075,1190 1075,1140 1095,1120 1113.99,1120 1129.6,1104.4 ; v1@1263.25,1186.1 1279.35,1170 ; 1279.35,1170 1613.87,1170 1665,1221.13 ; 1665,1221.13 v2(1761.73,1124.4) 1810.6,1124.4 ; 1251.76,1197.31 ccw(c1259.51,1210.72) 1263.51,1195.76 cw(c1259.51,1210.72) 1251.76,1197.31
  Bottom Layer w8: C16.1@317,909.5 367.5,909.5 v1(375,917) ; C16.1@321.62,918.09 ccw(c342.35,938.82) 342.35,909.5 ; C16.1@327.28,923.75 ccw(c361.66,958.14) 361.66,909.5 ; C16.1@332.76,909.5 ccw(c332.76,959.24) v1@367.93,924.07 ; 352.07,909.5 ccw(c352.07,939.93) v1@373.59,918.41 ; v1@475,1345 cw(c475,1320.86) 492.07,1337.93 cw(c509.14,1355) v1@485,1355 ; v1(475,1355) 605,1225 v1(945,1225) 1227.2,1225 v1(1266.1,1186.1) 1362.2,1090 1600,1090 1672.79,1162.79 U4.16@1682.99,1162.79 1723.35,1162.79 U4.1@1723.35,1203.14 ; v1(545,1085) v1(620,1085) ; v1@552.07,1077.93 cw(c569.14,1060.86) 569.14,1085 cw(c569.14,1109.14) v1@552.07,1092.07 ; U2.11@564.11,840.79 U2.11@564.11,860.89 ; v1@612.93,1077.93 ccw(c595.86,1060.86) 595.86,1085 ccw(c595.86,1109.14) v1@612.93,1092.07 ; v1@937.93,1217.93 ccw(c920.86,1200.86) 920.86,1225 ccw(c920.86,1249.14) v1@937.93,1232.07 ; v1@952.07,1217.93 cw(c969.14,1200.86) 969.14,1225 cw(c969.14,1249.14) v1@952.07,1232.07 ; v1(980,1360) v1(1365,1360) ; v1@987.07,1352.93 cw(c1004.14,1335.86) 1004.14,1360 cw(c1004.14,1384.14) v1@987.07,1367.07 ; v1(1070,970) 1115,970 v1(1145,1000) 1145,1015 ; v1@1077.07,962.93 cw(c1094.14,945.86) 1094.14,970 cw(c1094.14,994.14) v1@1077.07,977.07 ; v1@1135,1000 cw(c1110.86,1000) 1127.93,982.93 cw(c1145,965.86) v1@1145,990 ; v1@1139,1000 cw(c1160.73,1000) 1145.36,1015.36 ; v1@1141.15,1009.23 ccw(c1138.75,1015) 1145,1015 ; v1@1147,1000 cw(c1188.04,1000) 1159.02,1029.02 ; v1@1148.85,1009.23 cw(c1151.25,1015) 1145,1015 ; v1@1155,1000 cw(c1215.36,1000) 1172.68,1042.68 ; v1@1185,1065 cw(c1160.86,1065) 1177.93,1047.93 cw(c1195,1030.86) v1@1195,1055 ; v1(1195,1065) 1145,1015 ; v1@1256.1,1186.1 ccw(c1231.96,1186.1) 1249.03,1203.17 ccw(c1266.1,1220.24) v1@1266.1,1196.1 ; v1@1266.1,1176.1 cw(c1266.1,1151.96) 1283.17,1169.03 cw(c1300.24,1186.1) v1@1276.1,1186.1 ; C8.1@1347.43,750.27 ccw(c1327.37,770.32) 1355.73,770.32 ccw(c1384.09,770.32) C8.1@1364.04,750.27 ; C8.1@1355.73,741.96 1355.73,790.73 1440,875 v1(1445,875) ; v1@1357.93,1352.93 ccw(c1340.86,1335.86) 1340.86,1360 ccw(c1340.86,1384.14) v1@1357.93,1367.07 ; 1419.39,854.39 cw(c1445,828.79) v1@1445,865 ; 1431.46,866.46 ccw(c1422.93,875) v1@1435,875 ; C7.1@1492.89,532.95 ccw(c1493.4,568.07) 1518.23,543.23 ; C7.1@1492.9,533.27 1508.27,533.27 v1(1545,570) ; C7.1@1493.01,540.95 ccw(c1493.79,594.45) 1531.62,556.62 ; C7.1@1493.13,548.95 ccw(c1494.17,620.83) v1(1545,570) ; U5.2@1504.65,648.27 1521.73,648.27 1545,625 ; v1@1507.93,1082.93 ccw(c1490.86,1065.86) 1490.86,1090 ccw(c1490.86,1114.14) v1@1507.93,1097.07 ; U5.2@1509.57,647.47 cw(c1509.83,616.83) 1531.5,638.5 ; U5.2@1509.64,639.47 cw(c1510.06,590.06) 1545,625 ; v1@1522.07,1082.93 cw(c1539.14,1065.86) 1539.14,1090 cw(c1539.14,1114.14) v1@1522.07,1097.07 ; v1@1535,570 cw(c1510.86,570) 1527.93,552.93 cw(c1545,535.86) v1@1545,560 ; v1@1535.34,572.59 cw(c1512.02,578.84) 1524.09,557.93 cw(c1536.16,537.02) v1@1542.41,560.34 ; v1@1537.93,577.07 ccw(c1520.86,594.14) 1545,594.14 ccw(c1569.14,594.14) v1@1552.07,577.07 ; C6.1@1560.6,744.06 cw(c1523.74,707.21) 1575.87,707.21 cw(c1627.99,707.21) C6.1@1591.13,744.06 ; C6.1@1566.26,749.72 cw(c1543.06,726.52) 1575.87,726.52 cw(c1608.68,726.52) C6.1@1585.48,749.72 ; v1@1567.21,710 ccw(c1544.61,723.05) 1569.81,729.8 ; v1@1568.8,712.07 ccw(c1551.72,729.14) 1575.87,729.14 ccw(c1600.01,729.14) v1@1582.94,712.07 ; 1570.53,727.14 ccw(c1591.96,732.88) v1@1580.87,713.66 ; v1@1570.87,713.66 ccw(c1559.77,732.88) 1581.21,727.14 ; v1(1575.87,705) C6.1@1575.87,763.27 ; 1581.92,729.8 ccw(c1607.12,723.05) v1@1584.53,710 ; v1(1665,1370) v1(1865,1370) 2170,1370 2205,1335 2205,1110 v1(2180,1085) ; 1665.51,1155.51 cw(c1676.1,1144.92) U4.16@1676.1,1159.9 ; v1@1672.07,1362.93 cw(c1689.14,1345.86) 1689.14,1370 cw(c1689.14,1394.14) v1@1672.07,1377.07 ; U4.16@1691.93,1160.74 cw(c1696.86,1155.81) 1696.86,1162.79 cw(c1696.86,1169.76) U4.16@1691.93,1164.83 ; U4.12@1721.3,1054.59 ccw(c1716.37,1059.53) 1723.35,1059.53 ccw(c1730.32,1059.53) U4.12@1725.39,1054.59 ; U4.1@1721.3,1194.21 cw(c1716.37,1189.28) 1723.35,1189.28 cw(c1730.32,1189.28) U4.1@1725.39,1194.21 ; U4.12@1723.35,1045.66 U4.0@1723.35,1101.02 ; U4.0@1729.79,1084.5 cw(c1697.87,1044.63) 1748.94,1044.63 cw(c1779.56,1044.63) U4.0@1772.88,1074.51 ; U4.0@1734.79,1090.74 cw(c1711.2,1061.28) 1748.94,1061.28 ; U4.0@1735.34,1113.01 cw(c1758.41,1089.94) U4.0@1761.54,1122.41 ; 1743.87,1063.54 ccw(c1757.37,1067.16) U4.11@1750.38,1055.05 ; U4.11@1746.89,1054.59 ccw(c1741.96,1059.53) 1748.94,1059.53 ccw(c1755.91,1059.53) U4.11@1750.98,1054.59 ; U4.0@1747.33,1125 cw(c1760.52,1111.81) U4.0@1762.31,1130.37 ; U4.11@1747.52,1055.07 ccw(c1740.87,1066.88) 1753.96,1063.37 ; U4.11@1748.94,1045.66 U4.0@1748.94,1126.61 ; U4.11@1748.94,1054.62 cw(c1777.33,1054.62) U4.0@1771.13,1082.32 ; 1748.94,1064.6 cw(c1775.09,1064.6) U4.0@1769.39,1090.13 ; U4.0@1748.94,1069.37 cw(c1816.77,1069.37) U4.0@1768.8,1117.33 ; U4.0@1748.94,1088.68 cw(c1797.45,1088.68) U4.0@1763.15,1122.99 ; U4.0@1748.94,1108 cw(c1778.14,1108) U4.0@1757.49,1128.64 ; 1750.56,1060.67 ccw(c1759.06,1058.4) U4.11@1751.44,1054 ; U4.0@1758.27,1133.78 ccw(c1749.9,1156.43) 1771.83,1146.33 ccw(c1793.76,1136.24) U4.0@1771.11,1127.87 ; U4.0@1760.77,1114.45 ccw(c1756.29,1068.07) U4.0@1723.35,1101.02 ; U4.0@1763.52,1125.29 cw(c1778.34,1132.63) U4.0@1766.65,1144.32 ; U4.0@1764.09,1114.68 cw(c1769.79,1091.22) 1782.35,1111.84 cw(c1794.91,1132.46) U4.0@1771.45,1126.76 ; U4.0@1770.69,1128.84 cw(c1788.87,1137.85) U4.0@1774.53,1152.2 ; U4.0@1774.53,1111.61 U4.7@1840.47,1111.61 ; U4.0@1774.53,1126.61 U4.0@1769.23,1131.9 ; U4.0@1795.67,1097.8 cw(c1824.03,1075.57) 1824.03,1111.61 ; U4.0@1795.67,1151 ccw(c1824.03,1173.24) 1824.03,1137.2 ; U4.0@1796.1,1117.18 cw(c1820.76,1112) 1820.76,1137.2 ; U4.0@1796.1,1131.62 ccw(c1820.76,1136.8) 1820.76,1111.61 ; U4.9@1798.08,1054.59 ccw(c1793.14,1059.53) 1800.12,1059.53 ccw(c1807.09,1059.53) U4.9@1802.16,1054.59 ; U4.0@1801.96,1092.86 cw(c1840.47,1062.68) U4.7@1840.47,1111.61 ; U4.0@1801.96,1155.94 ccw(c1840.47,1186.12) U4.6@1840.47,1137.2 ; U4.9@1802.16,1043.62 cw(c1807.09,1038.69) 1807.09,1045.66 cw(c1807.09,1052.64) U4.9@1802.16,1047.7 ; U4.0@1803.93,1115.54 cw(c1830.62,1109.93) U4.6@1830.62,1137.2 ; U4.0@1803.93,1133.27 ccw(c1830.62,1138.87) U4.7@1830.62,1111.61 ; U4.0@1811.76,1113.89 cw(c1840.47,1107.86) U4.6@1840.47,1137.2 ; U4.0@1811.76,1134.91 ccw(c1840.47,1140.95) U4.7@1840.47,1111.61 ; 1823.15,1106.97 ccw(c1819.77,1119.58) U4.7@1831.08,1113.05 ; 1823.15,1116.25 cw(c1819.77,1103.63) U4.7@1831.08,1110.16 ; 1823.15,1132.56 ccw(c1819.77,1145.17) U4.6@1831.08,1138.64 ; 1823.15,1141.84 cw(c1819.77,1129.22) U4.6@1831.08,1135.75 ; 1824.85,1113.15 ccw(c1827.34,1122.42) U4.7@1832.14,1114.11 ; 1824.85,1135.65 cw(c1827.34,1126.38) U4.6@1832.14,1134.69 ; U4.7@1831.54,1109.56 ccw(c1826.61,1104.63) 1826.61,1111.61 ccw(c1826.61,1118.58) U4.7@1831.54,1113.65 ; U4.6@1831.54,1135.15 ccw(c1826.61,1130.22) 1826.61,1137.2 ccw(c1826.61,1144.17) U4.6@1831.54,1139.24 ; U4.5@1831.54,1160.74 ccw(c1826.61,1155.81) 1826.61,1162.79 ccw(c1826.61,1169.76) U4.5@1831.54,1164.83 ; R5.1@1832.17,984.93 ccw(c1808.75,1008.35) 1841.87,1008.35 ccw(c1874.98,1008.35) R5.1@1851.57,984.93 ; U4.7@1838.43,1113.65 ccw(c1833.5,1118.58) 1840.47,1118.58 ccw(c1847.45,1118.58) U4.7@1842.52,1113.65 ; U4.6@1838.43,1135.15 cw(c1833.5,1130.22) 1840.47,1130.22 cw(c1847.45,1130.22) U4.6@1842.52,1135.15 ; U4.6@1838.43,1139.24 ccw(c1833.5,1144.17) 1840.47,1144.17 ccw(c1847.45,1144.17) U4.6@1842.52,1139.24 ; U4.5@1838.43,1160.74 cw(c1833.5,1155.81) 1840.47,1155.81 cw(c1847.45,1155.81) U4.5@1842.52,1160.74 ; R5.1@1841.87,988.95 ccw(c1841.87,1026.82) 1868.64,1000.04 ; R5.1@1855.58,975.24 cw(c1883.94,975.24) 1863.89,995.29 ; v1@1857.93,1362.93 ccw(c1840.86,1345.86) 1840.86,1370 ccw(c1840.86,1394.14) v1@1857.93,1377.07 ; v1@1872.07,1362.93 cw(c1889.14,1345.86) 1889.14,1370 cw(c1889.14,1394.14) v1@1872.07,1377.07 ; C4.1@1914.96,1097.73 cw(c1894.91,1077.68) 1923.27,1077.68 cw(c1951.63,1077.68) C4.1@1931.57,1097.73 ; C4.1@1927.89,1108.69 ccw(c1948.54,1129.35) 1948.54,1100.14 ; C4.1@1933.54,1114.35 ccw(c1967.86,1148.66) 1967.86,1100.14 ; v1@1950,1005 ccw(c1925.86,1005) 1942.93,1022.07 ccw(c1960,1039.14) 1960,1015 ccw(c1960,1039.14) 1977.07,1022.07 ccw(c1994.14,1005) v1@1970,1005 ; v1@1952.93,997.93 ccw(c1935.86,980.86) 1935.86,1005 ccw(c1935.86,1029.14) v1@1952.93,1012.07 ; v1@1967.07,997.93 cw(c1976.25,988.75) 1976.25,1001.73 ; v1@1967.07,1012.07 ccw(c1992.03,1037.03) 1992.03,1001.73 ; C3.1@1979.06,1084.87 ccw(c1942.21,1048.01) 1942.21,1100.14 ccw(c1942.21,1152.26) C3.1@1979.06,1115.4 ; C3.1@1983,1084.87 cw(c1946.14,1048.01) 1998.27,1048.01 cw(c2050.39,1048.01) C3.1@2013.53,1084.87 ; C3.1@1984.72,1090.53 ccw(c1961.52,1067.33) 1961.52,1100.14 ccw(c1961.52,1132.95) C3.1@1984.72,1109.75 ; C3.1@1988.66,1090.53 cw(c1965.46,1067.33) 1998.27,1067.33 cw(c2031.08,1067.33) C3.1@2007.88,1090.53 ; C9.1@2021.01,990.64 ccw(c1994.24,963.87) 1994.24,1001.73 ccw(c1994.24,1039.6) C9.1@2021.01,1012.82 ; C3.1@2022,1091.53 cw(c2035.13,1085.82) 2035.13,1100.14 ; C3.1@2022,1108.74 ccw(c2035.13,1114.45) 2035.13,1100.14 ; C9.1@2030.13,1001.73 1963.27,1001.73 v1(1960,1005) ; v1@2065,1140 cw(c2040.86,1140) 2057.93,1122.93 cw(c2075,1105.86) v1@2075,1130 ; v1(2075,1140) 2035.14,1100.14 ; v1@2180,1095 ccw(c2180,1119.14) 2197.07,1102.07 ccw(c2214.14,1085) v1@2190,1085 ; v1(1545,570) 1545,625 ; U4.0@1723.35,1101.02 U4.0@1748.94,1126.61 ; U4.0@1748.94,1126.61 U4.0@1761.73,1139.4 ; v2(1761.73,1124.4) U4.0@1769.23,1131.9 ; v2(1761.73,1124.4) U4.0@1774.53,1137.2 ; v2(1761.73,1124.4) U4.0@1774.53,1152.2 ; v2(1761.73,1124.4) 1800.12,1101.02 U4.9@1800.12,1045.66 1819.34,1045.66 1841.87,1023.13 R5.1@1841.87,973.27 1873.6,1005 v1(1960,1005) ; U4.0@1761.73,1139.4 U4.0@1774.53,1152.2 ; U4.0@1761.73,1139.4 U4.0@1769.23,1131.9 ; U4.0@1769.23,1131.9 U4.0@1774.53,1137.2 ; U4.0@1774.53,1137.2 U4.6@1840.47,1137.2 ; U4.0@1774.53,1137.2 1800.12,1162.79 U4.5@1840.47,1162.79 U4.6@1840.47,1137.2 ; U4.7@1840.47,1111.61 U4.6@1840.47,1137.2 ; v1(1960,1005) 1923.27,1041.73 1923.27,1100.14 C3.1@1998.27,1100.14 ; v1(1960,1005) 1998.27,1043.27 C3.1@1998.27,1100.14 ; C3.1@1998.27,1100.14 2035.14,1100.14
  other v1: 735,58 106,90 1701,118 2219,121 700,144 1317,159 451,192 1473,278 540,315 878,330 1819,341 1270,379 728,399 1922,408 658,418 1473,421 231,447 910,528 1922,586 274,671 994,770 702,776 894,858 234,859 46,876 1779,905 2003,941 1452,945 1265,960 1515,1090
MISO: FIL4.1 U2.17 | length 347.9
  Top Layer w8: v1@712.93,912.07 ccw(c695.86,929.14) 720,929.14 ccw(c744.14,929.14) v1@727.07,912.07 ; v1(720,905) 720,955 746.91,981.91 FIL4.1@746.91,1089.79
  Bottom Layer w8: v1@712.93,897.93 cw(c701.52,886.52) 717.65,886.52 ; U2.17@715.61,868.42 ccw(c710.68,873.36) 717.65,873.36 ccw(c724.63,873.36) U2.17@719.7,868.42 ; U2.17@717.65,840.79 717.65,902.65 v1(720,905) ; 717.65,875.19 cw(c749.81,875.19) v1@727.07,897.93
MOSI: FIL3.3 U2.16 | length 343.4
  Top Layer w8: v1@682.93,942.07 ccw(c665.86,959.14) 690,959.14 ccw(c714.14,959.14) v1@697.07,942.07 ; v1(690,935) 690,960 706.28,976.28 FIL3.3@706.28,1089.79
  Bottom Layer w8: v1@682.93,927.93 cw(c660.88,905.88) 692.06,905.88 ; U2.16@690.02,868.42 ccw(c685.09,873.36) 692.06,873.36 ccw(c699.04,873.36) U2.16@694.11,868.42 ; v1(690,935) 692.06,932.94 U2.16@692.06,840.79 ; 692.06,915.84 cw(c709.16,915.84) v1@697.07,927.93
NetC3_2: C3.2 C4.2 D1.3 U4.2 U4.3 U4.4 U4.8 | length 781
  Bottom Layer w10: U4.2@1748.94,1203.14 U4.2@1750.8,1205 ; U4.8@1840.47,1086.02 1861.02,1086.02 1875,1100 1875,1155 1887.06,1167.06 ; C4.2@1912.84,1154.52 ccw(c1887.07,1134.3) 1887.07,1167.06 ; C4.2@1923.27,1167.06 1887.06,1167.06
  Bottom Layer w15: U4.2@1750.8,1205 1885.33,1205 1923.27,1167.06 C3.2@1998.27,1167.06 2059.2,1228 D1.3@2110.73,1228 ; 1901.65,1188.68 cw(c1874.13,1161.16) C4.2@1913.05,1161.16 ; C4.2@1931.07,1155.33 cw(c1959.41,1126.99) 1959.41,1167.06 ; C3.2@1981.54,1154.27 ccw(c1950.66,1123.39) 1950.66,1167.06 ccw(c1950.66,1210.74) C3.2@1981.54,1179.86 ; C3.2@2002.2,1185.16 ccw(c2002.2,1219.32) 2026.37,1195.16 ; C3.2@2020.29,1167.06 cw(c2073.47,1167.06) 2035.87,1204.67
NetC5_1: C5.1 R4.1 R5.2 U4.10 | length 680
  Bottom Layer w8: R4.1@1568.87,923.27 1568.87,943.87 1590,965 ; R4.1@1578.98,937.78 cw(c1594.01,945.27) 1582.14,957.14 ; R4.1@1586.14,941.35 cw(c1604.5,950.5) 1590,965 ; 1726.62,965 ccw(c1726.62,1019.62) R5.2@1765.24,981 ; 1745.93,965 ccw(c1745.93,1000.31) R5.2@1770.89,975.34 ; 1757.03,965 cw(c1757.03,953.39) R5.2@1765.24,961.6 ; R5.2@1765.24,984.93 ccw(c1742.81,1007.36) 1774.53,1007.36 ; U4.10@1772.48,1036.73 cw(c1767.55,1031.8) 1774.53,1031.8 cw(c1781.5,1031.8) U4.10@1776.57,1036.73 ; 1774.53,1009.34 ccw(c1809.04,1009.34) R5.2@1784.64,984.93 ; U4.10@1774.53,1045.66 1774.53,973.68 R5.2@1774.94,973.27 1766.67,965 1590,965
  Bottom Layer w10: C5.1@1562.51,868.65 ccw(c1535.11,896.06) 1573.87,896.06 ; R4.1@1564.87,922.31 cw(c1543.17,900.6) 1573.87,900.6 cw(c1604.57,900.6) R4.1@1582.86,922.31 ; 1573.87,891.38 ccw(c1606.01,891.38) C5.1@1583.28,868.65 ; R4.1@1573.87,933.27 1573.87,859.27 C5.1@1574.87,858.27
NetC7_2: C7.2 U5.4 | length 326.9
  Bottom Layer w10: U5.4@1404.65,605.35 cw(c1391.34,592.05) 1410.16,592.05 cw(c1428.98,592.05) U5.4@1415.67,605.35 ; 1410.16,565.79 ccw(c1459.34,565.79) C7.2@1426.34,529.33 ; 1410.16,588.33 ccw(c1479.73,588.33) C7.2@1433.05,536.74 ; C7.2@1415.47,535.94 ccw(c1396.57,539.43) 1410.16,553.01 ; C7.2@1427.24,547.71 cw(c1423.74,566.6) 1410.16,553.01 ; C7.2@1429.91,533.27 1410.16,553.02 ; C7.2@1439.76,544.16 cw(c1500.12,610.86) U5.4@1410.16,610.87 1410.16,553.02
NetC10_2: C10.2 CONN4.5 R11.1 | length 529.1
  Bottom Layer w12: CONN4.5@2002.26,575.01 2031.99,575.01 2082.56,524.44 C10.2@2082.56,263 ; CONN4.5@2041.54,579.01 ccw(c2074.23,579.01) 2051.11,555.89 ; C10.2@2075.67,271.86 ccw(c2059.03,288.5) 2082.56,288.5 ccw(c2106.09,288.5) C10.2@2089.45,271.86 ; R11.1@2075.82,331.42 cw(c2059.55,315.15) 2082.56,315.15 ; R11.1@2075.82,362.58 ccw(c2059.55,378.85) 2082.56,378.85 ; 2082.56,300.97 cw(c2125.62,300.97) R11.1@2095.17,331.42 ; 2082.56,393.03 ccw(c2125.62,393.03) R11.1@2095.17,362.58
NetCONN1_3: CONN1.3 FIL1.4 | length 99.8
  Top Layer w8: CONN1.3@1141.19,1199.67 cw(c1121.66,1180.14) 1149.28,1180.14 ; CONN1.3@1146.72,1223.9 1149.28,1221.33 FIL1.4@1149.28,1154.75 ; 1149.28,1192.54 cw(c1159.38,1192.54) CONN1.3@1152.24,1199.67
NetCONN1_4: CONN1.4 FIL1.5 | length 99.8
  Top Layer w8: CONN1.4@1101.82,1199.67 cw(c1082.29,1180.14) 1109.91,1180.14 ; CONN1.4@1107.35,1223.9 1109.91,1221.33 FIL1.5@1109.91,1154.75 ; 1109.91,1192.54 cw(c1120.01,1192.54) CONN1.4@1112.87,1199.67
NetCONN2_3: CONN2.3 FIL2.4 | length 99.4
  Top Layer w8: CONN2.3@1836.19,1199.67 cw(c1819.08,1182.56) 1843.28,1182.56 ; CONN2.3@1841.72,1223.9 1843.28,1222.33 FIL2.4@1843.28,1154.75 ; 1843.28,1190.12 cw(c1856.79,1190.12) CONN2.3@1847.24,1199.67
NetCONN2_4: CONN2.4 FIL2.5 | length 99.4
  Top Layer w8: CONN2.4@1796.82,1199.67 cw(c1779.71,1182.56) 1803.91,1182.56 ; CONN2.4@1802.35,1223.9 1803.91,1222.33 FIL2.5@1803.91,1154.75 ; 1803.91,1190.12 cw(c1817.42,1190.12) CONN2.4@1807.87,1199.67
NetCONN3_3: CONN3.3 FIL4.4 | length 99.8
  Top Layer w8: CONN3.3@778.26,1199.67 cw(c758.91,1180.31) 786.28,1180.31 ; CONN3.3@783.79,1223.9 786.28,1221.4 FIL4.4@786.28,1154.75 ; 786.28,1192.36 cw(c796.62,1192.36) CONN3.3@789.31,1199.67
NetCONN3_4: CONN3.4 FIL4.5 | length 99.8
  Top Layer w8: CONN3.4@738.89,1199.67 cw(c719.54,1180.31) 746.91,1180.31 ; CONN3.4@744.42,1223.9 746.91,1221.4 FIL4.5@746.91,1154.75 ; 746.91,1192.36 cw(c757.25,1192.36) CONN3.4@749.94,1199.67
NetCONN3_5: CONN3.5 FIL3.4 | length 99.3
  Top Layer w8: CONN3.5@699.52,1199.67 cw(c683.21,1183.36) 706.28,1183.36 ; CONN3.5@705.05,1223.9 706.28,1222.66 FIL3.4@706.28,1154.75 ; 706.28,1189.32 cw(c720.92,1189.32) CONN3.5@710.57,1199.67
NetCONN3_6: CONN3.6 FIL3.5 | length 99.3
  Top Layer w8: CONN3.6@660.15,1199.67 cw(c643.84,1183.36) 666.91,1183.36 ; CONN3.6@665.68,1223.9 666.91,1222.66 FIL3.5@666.91,1154.75 ; 666.91,1189.32 cw(c681.55,1189.32) CONN3.6@671.2,1199.67
NetCONN4_2: CONN4.2 R9.1 | length 184.2
  Bottom Layer w12: R9.1@1866.46,699 1892,699 ; R9.1@1875.35,691.36 cw(c1892,677.03) 1892,699 ; R9.1@1875.35,706.64 ccw(c1892,720.97) 1892,699 ; CONN4.2@2002.26,673.5 1917.5,673.5 1892,699
NetCONN4_3: CONN4.3 R8.1 | length 188.1
  Bottom Layer w12: R8.1@1866.46,623 1871.46,628 1916,628 1930,642 CONN4.3@2002.26,642 ; R8.1@1874.75,616.68 cw(c1902.07,589.36) 1902.07,628 ; R8.1@1874.75,633.25 ccw(c1887.43,645.94) 1887.43,628